# Altium PCB arduino_voltage_monitor_shield.PcbDoc
Units mm, origin at the board's own origin, x right, y up, seen from the top; angles counter-clockwise.
Board outline 50 x 53 mm, 2 copper layers (Top Layer, Bottom Layer); 58 components, 32 nets, 192 pads, 77 vias.
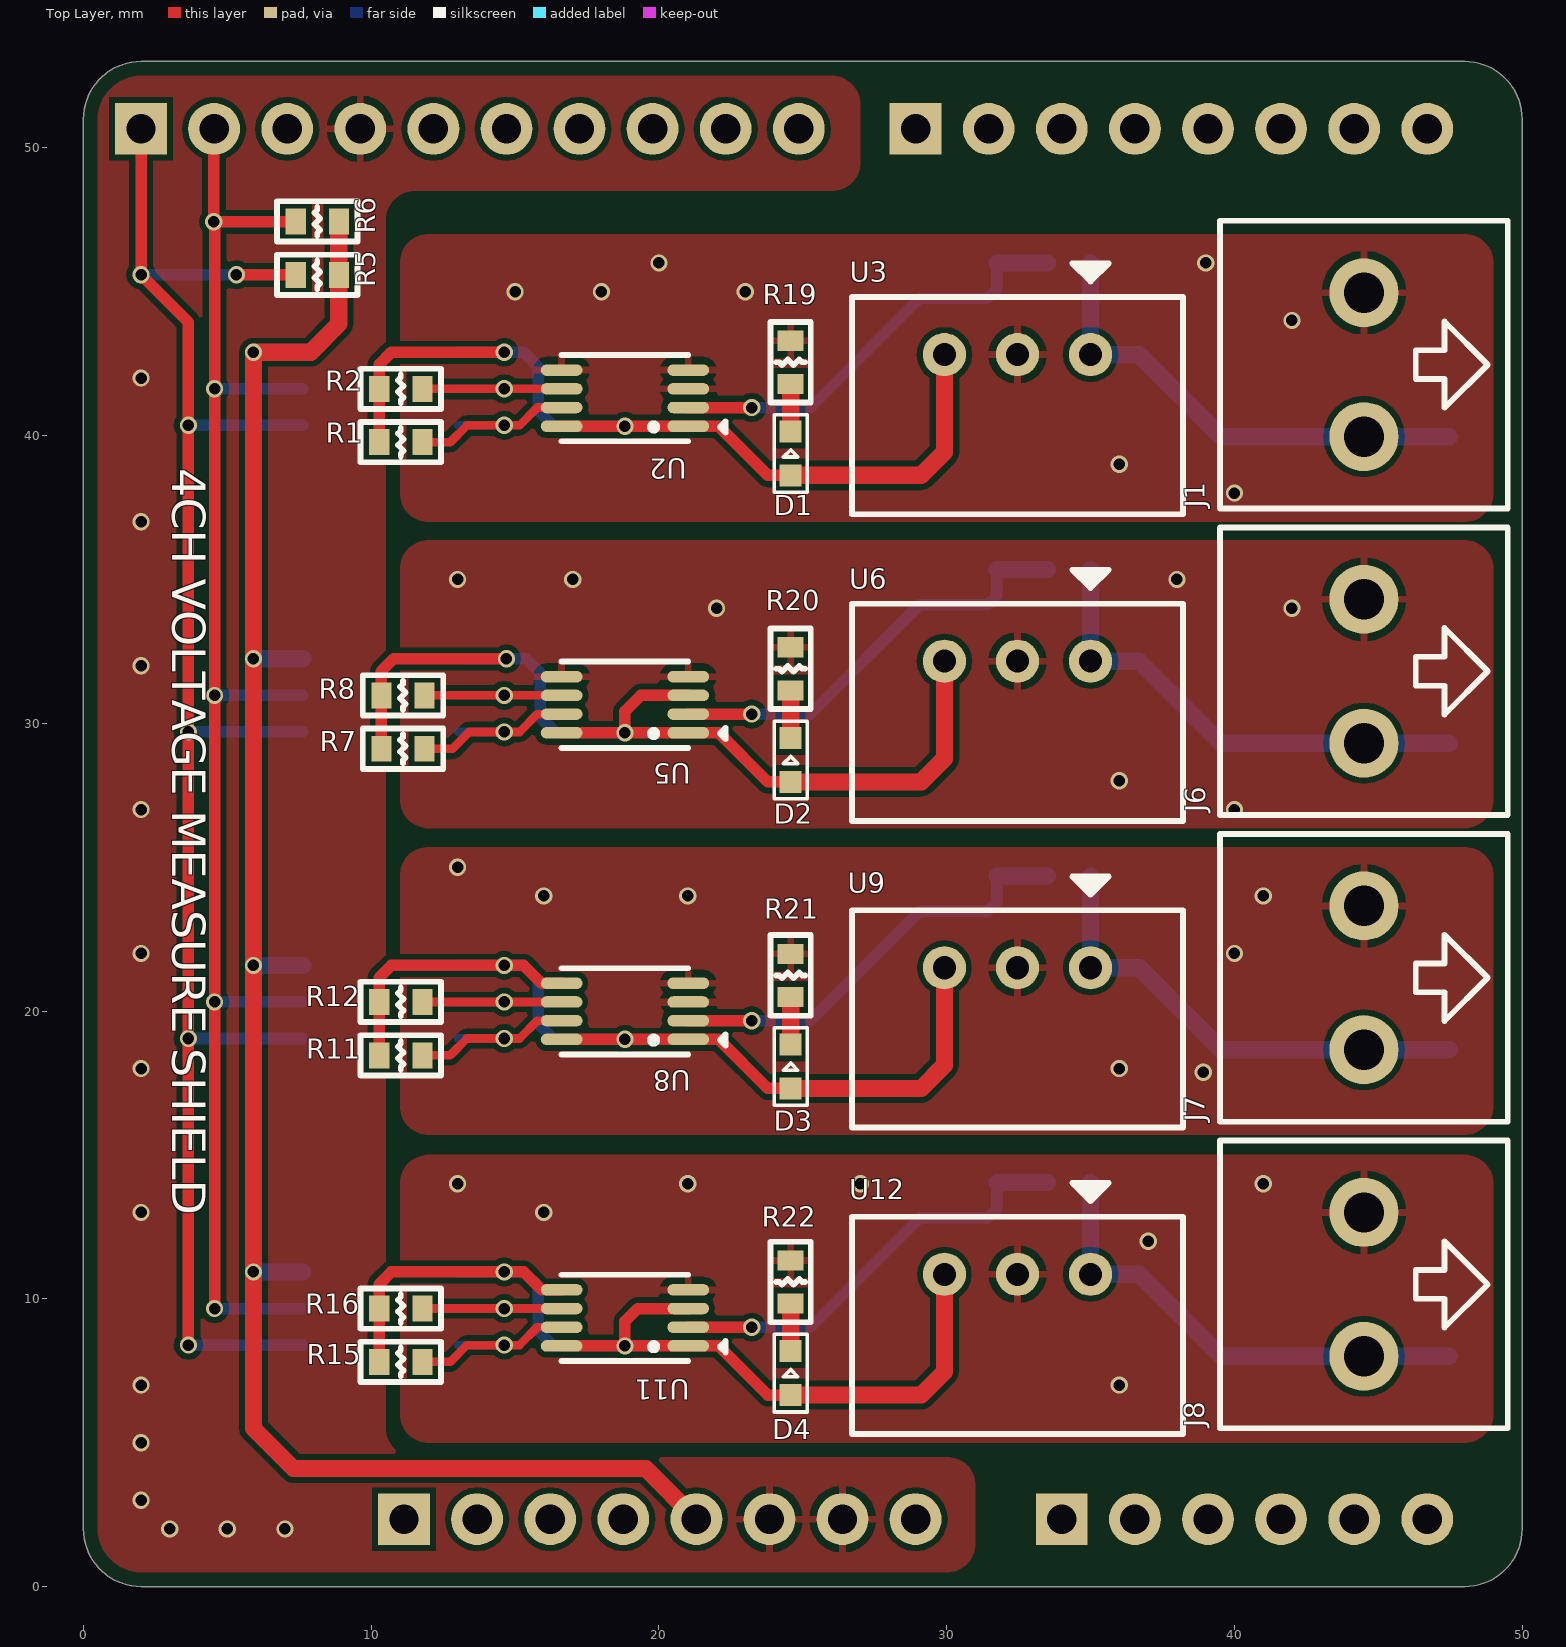
[diagram p0: Top Layer view]
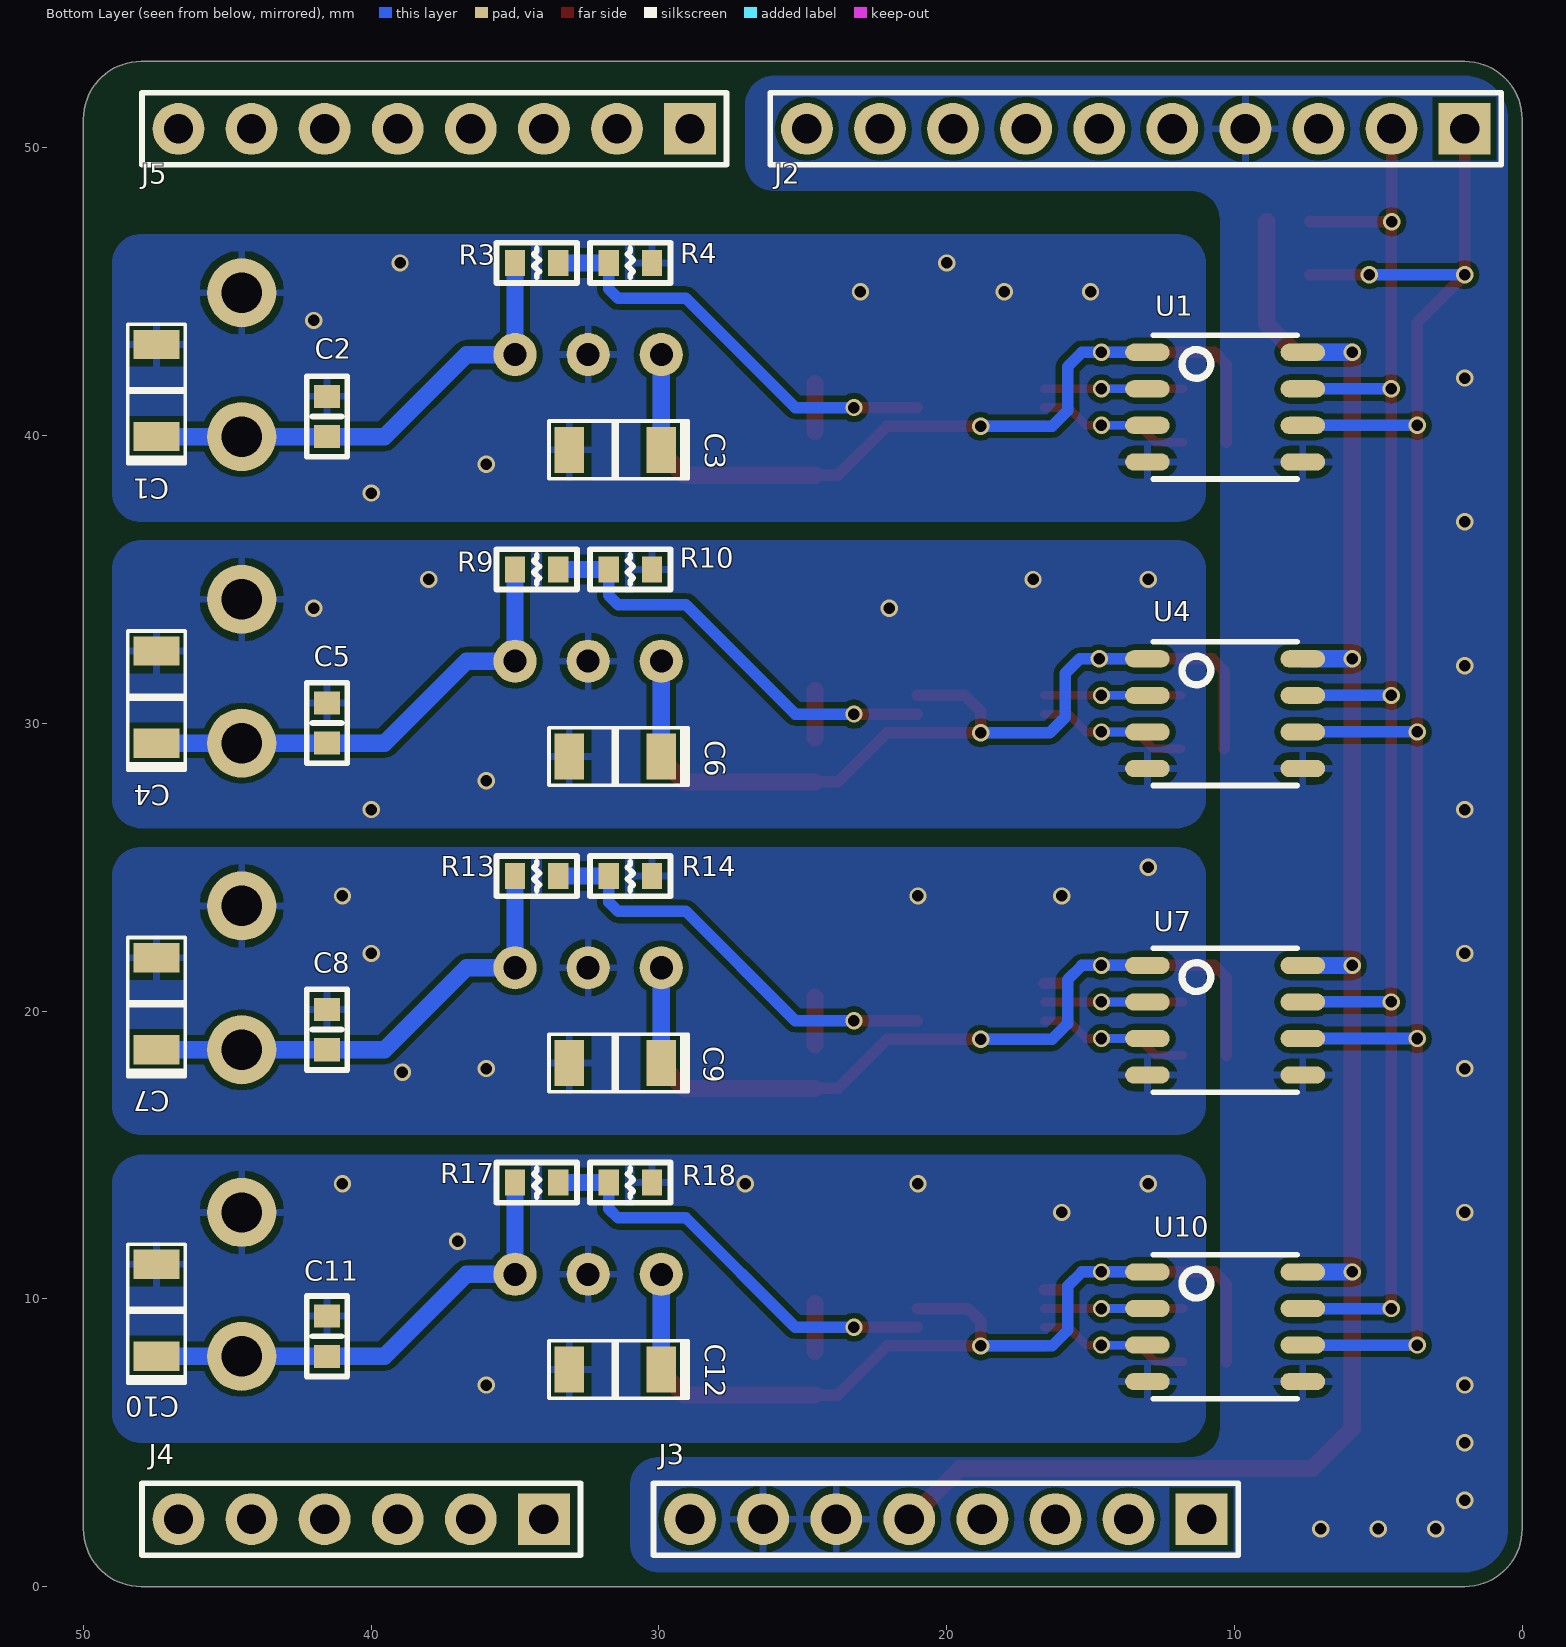
[diagram p1: Bottom Layer view, seen from below]
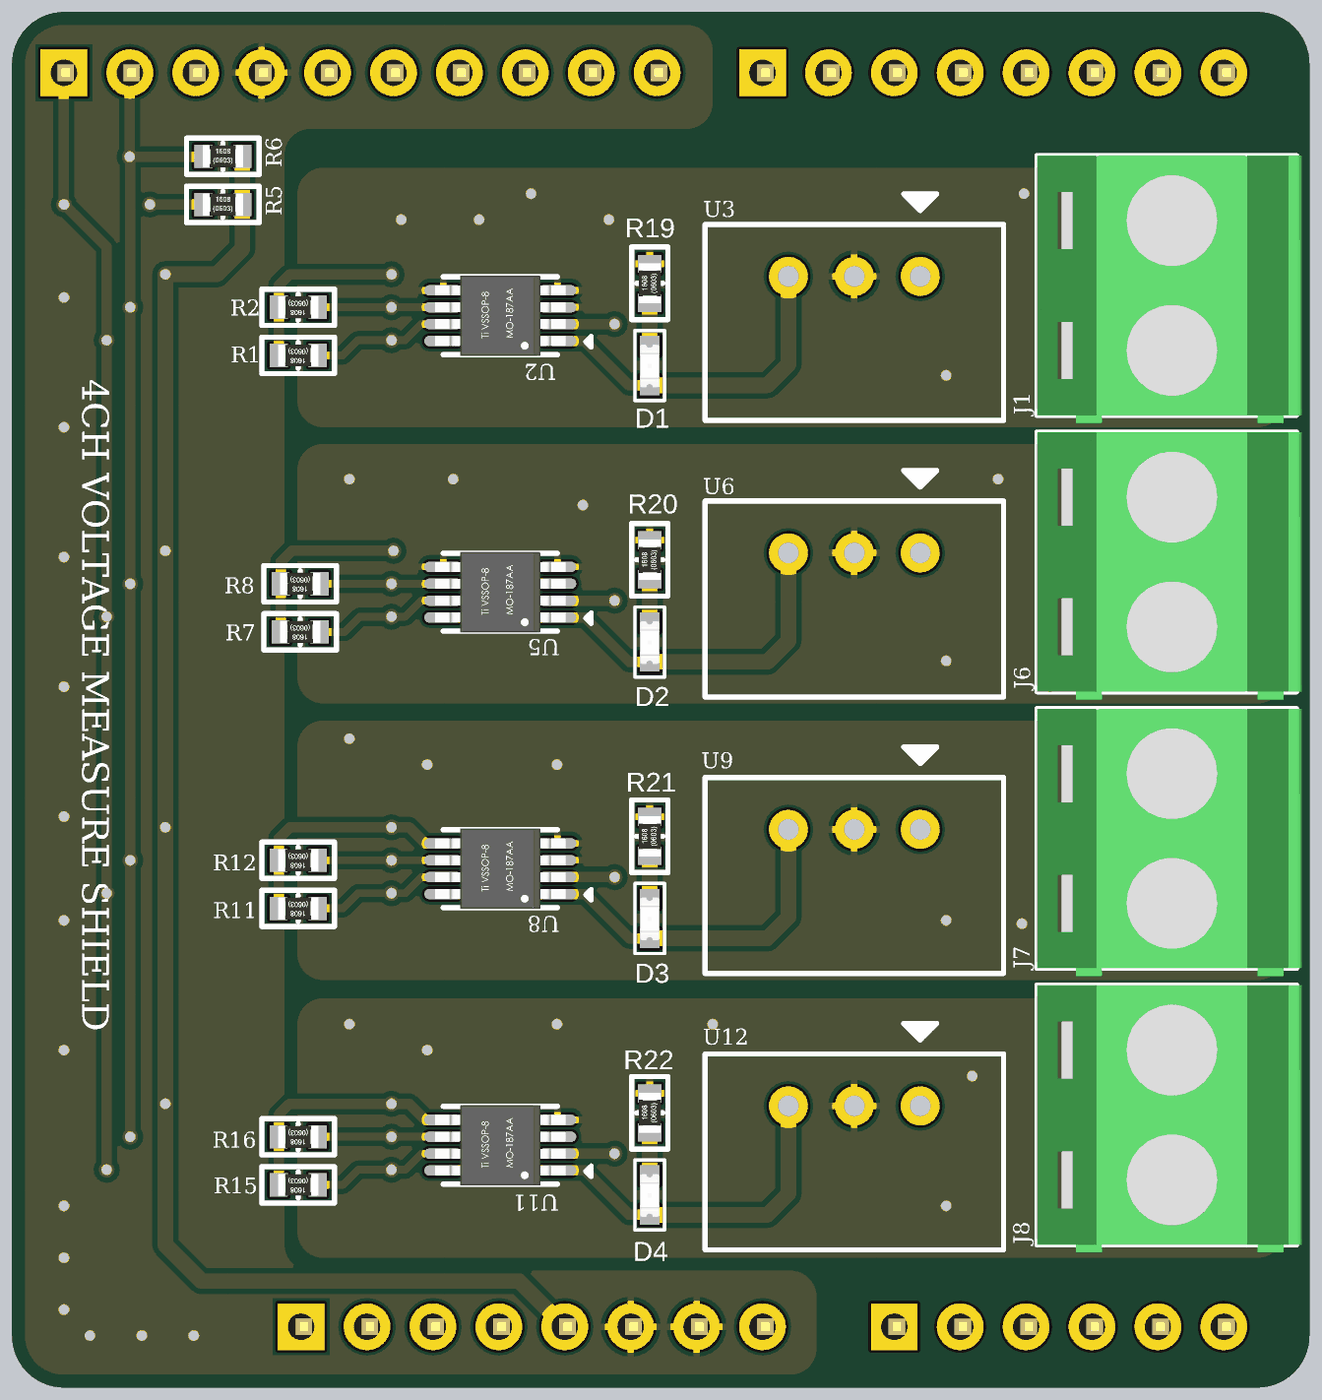
[diagram p2: 3D render of the assembled board from above, using the file's embedded part models]
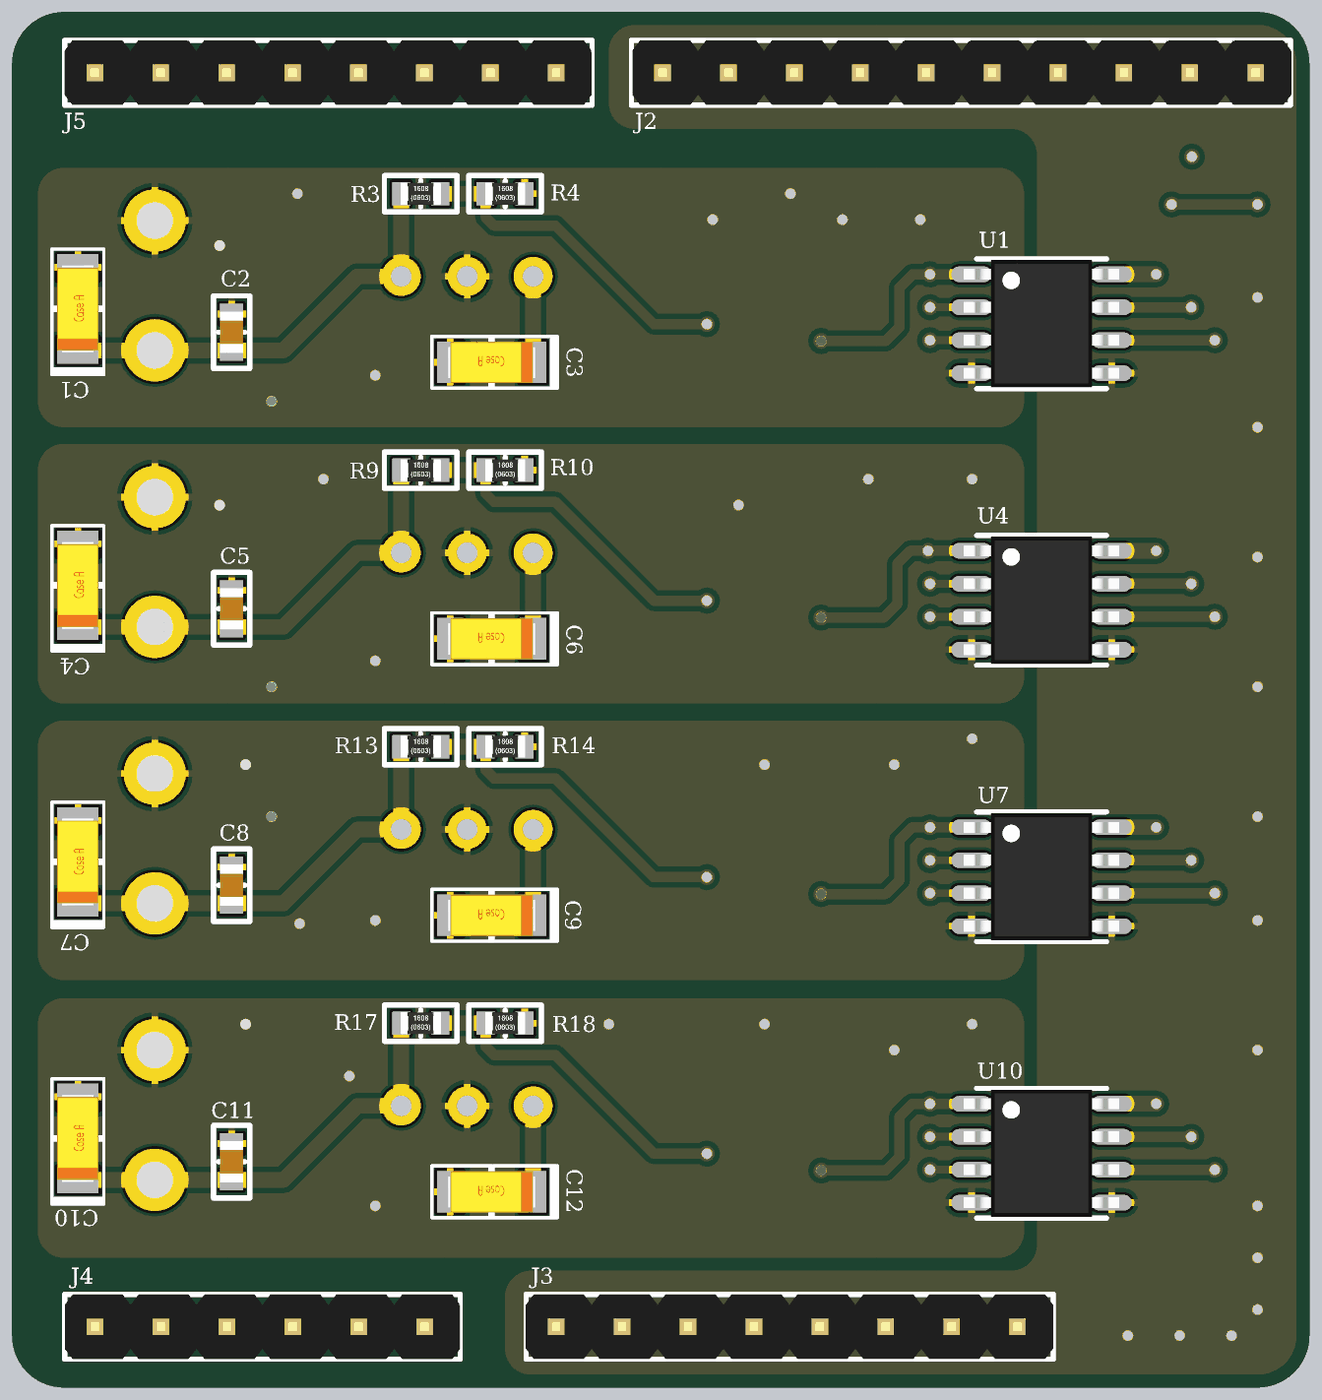
[diagram p3: 3D render of the assembled board from below, using the file's embedded part models]

## Layer stack, top to bottom
Top Solder: solder mask 0.0102, Solder Resist, Dk 3.5
Top Layer: signal copper 0.0356
Dielectric 1: dielectric 0.32, FR-4, Dk 4.8
Bottom Layer: signal copper 0.0356
Bottom Solder: solder mask 0.0102, Solder Resist, Dk 3.5

## Board outline
0,2 0,51 cw(c2,51) 2,53 48,53 cw(c48,51) 50,51 50,2 cw(c48,2) 48,0 2,0 cw(c2,2)

## Design rules (kind name [scope] priority, off if disabled: settings)
Clearance [All] p1: gap=0.2 ignorepadtopadclearanceinfootprint=FALSE
HoleSize [All] p1: absolutevalues=TRUE maxlimit=3.2 minlimit=0.025 maxpercent=80.000 minpercent=20.000
MinimumSolderMaskSliver [All] p1: minsoldermaskwidth=0.01
PolygonConnect PolygonConnect_1 [IsVia] p1: connectstyle=Direct reliefconductorwidth=0.254 reliefentries=4 polygonreliefangle="90 Angle" airgapwidth=0.254
PolygonConnect [All] p2: connectstyle=Relief reliefconductorwidth=0.254 reliefentries=4 polygonreliefangle="90 Angle" airgapwidth=0.254
RoutingVias [All] p1: holewidth=0.4 width=0.6 viastyle="Through Hole" minholewidth=0.4 minwidth=0.6 maxholewidth=0.4 maxwidth=0.6
SilkToSilkClearance [All] p1: silktosilkclearance=0.01
SilkToSolderMaskClearance [IsPad] p1: minsilkscreentomaskgap=0.1 clearancetoexposedcopper=TRUE
SolderMaskExpansion [All] p1: expansion=0.102
Width [All] p1: maxlimit=2 minlimit=0.2 preferedwidth=0.2
26 further rules are at their usual default settings.

## Components (designator, comment, footprint, x,y, rotation, side; value= is the part's Value field where it differs from the comment)
C1 "EC" ECAP-TANTAL-A 47.463,41.563 r90 bottom value=22uF/35V
C2 "C" CAP1608L 41.537,40.663 r270 bottom value=0.1uF
C3 "EC" ECAP-TANTAL-A 31.52,39.505 r0 bottom value=22uF/35V
C4 "EC" ECAP-TANTAL-A 47.463,30.908 r90 bottom value=22uF/35V
C5 "C" CAP1608L 41.537,30.008 r270 bottom value=0.1uF
C6 "EC" ECAP-TANTAL-A 31.52,28.85 r0 bottom value=22uF/35V
C7 "EC" ECAP-TANTAL-A 47.463,20.254 r90 bottom value=22uF/35V
C8 "C" CAP1608L 41.537,19.354 r270 bottom value=0.1uF
C9 "EC" ECAP-TANTAL-A 31.52,18.196 r0 bottom value=22uF/35V
C10 "EC" ECAP-TANTAL-A 47.463,9.6 r90 bottom value=22uF/35V
C11 "C" CAP1608L 41.537,8.7 r270 bottom value=0.1uF
C12 "EC" ECAP-TANTAL-A 31.52,7.542 r0 bottom value=22uF/35V
D1 "LED" LED1608L 24.577,39.379 r270 top value=GREEN
D2 "LED" LED1608L 24.577,28.725 r270 top value=GREEN
D3 "LED" LED1608L 24.577,18.07 r270 top value=GREEN
D4 "LED" LED1608L 24.577,7.416 r270 top value=GREEN
J1 "CON2" DG128-5.0-02P 44.5,42.463 r90 top
J2 "CON10" PIN-HEADER-2.54-10P 2,50.66 r180 bottom
J3 "CON8" PIN-HEADER-2.54-8P 11.14,2.34 r180 bottom
J4 "CON6" PIN-HEADER-2.54-6P 34,2.34 r180 bottom
J5 "CON8" PIN-HEADER-2.54-8P 28.92,50.66 r180 bottom
J6 "CON2" DG128-5.0-02P 44.5,31.808 r90 top
J7 "CON2" DG128-5.0-02P 44.5,21.154 r90 top
J8 "CON2" DG128-5.0-02P 44.5,10.5 r90 top
R1 "R" RES1608L 11.026,39.769 r180 top value=4.7K
R2 "R" RES1608L 11.026,41.624 r180 top value=4.7K
R3 "R" RES1608L 34.25,46 r180 bottom value=470K
R4 "R" RES1608L 30.996,46 r180 bottom value=110K
R5 "R" RES1608L 8.125,45.586 r0 top value=4.7K
R6 "R" RES1608L 8.125,47.44 r0 top value=4.7K
R7 "R" RES1608L 11.103,29.115 r180 top value=4.7K
R8 "R" RES1608L 11.103,30.969 r180 top value=4.7K
R9 "R" RES1608L 34.25,35.346 r180 bottom value=470K
R10 "R" RES1608L 30.996,35.346 r180 bottom value=110K
R11 "R" RES1608L 11.026,18.461 r180 top value=4.7K
R12 "R" RES1608L 11.026,20.315 r180 top value=4.7K
R13 "R" RES1608L 34.25,24.692 r180 bottom value=470K
R14 "R" RES1608L 30.996,24.692 r180 bottom value=110K
R15 "R" RES1608L 11.026,7.807 r180 top value=4.7K
R16 "R" RES1608L 11.026,9.661 r180 top value=4.7K
R17 "R" RES1608L 34.25,14.037 r180 bottom value=470K
R18 "R" RES1608L 30.996,14.037 r180 bottom value=110K
R19 "R" RES1608L 24.577,42.547 r90 top value=1K
R20 "R" RES1608L 24.577,31.892 r90 top value=1K
R21 "R" RES1608L 24.577,21.238 r90 top value=1K
R22 "R" RES1608L 24.577,10.584 r90 top value=1K
U1 "ISO1540" SOIC-8 10.324,40.989 r180 bottom
U2 "ADS7823" VSSOP-8_DGK 18.816,41.299 r180 top
U3 "R-785.0-0.5" R-785.0-0.5 32.46,42.813 r180 top
U4 "ISO1540" SOIC-8 10.324,30.334 r180 bottom
U5 "ADS7823" VSSOP-8_DGK 18.816,30.644 r180 top
U6 "R-785.0-0.5" R-785.0-0.5 32.46,32.158 r180 top
U7 "ISO1540" SOIC-8 10.324,19.68 r180 bottom
U8 "ADS7823" VSSOP-8_DGK 18.816,19.99 r180 top
U9 "R-785.0-0.5" R-785.0-0.5 32.46,21.504 r180 top
U10 "ISO1540" SOIC-8 10.324,9.026 r180 bottom
U11 "ADS7823" VSSOP-8_DGK 18.816,9.336 r180 top
U12 "R-785.0-0.5" R-785.0-0.5 32.46,10.85 r180 top

## Footprints (in the part's own frame and the unit in brackets; to place one, negate y for a bottom-side part, rotate by r counter-clockwise, add the part's x,y. Pads: shape width x height; smd on the part's side, far side on the other; paste and mask are expansions set on the pad)
CAP1608L [mm]
  rect 0.8x0.9 smd: 1(-0.7,0) 2(0.7,0)
  silkscreen extent -1.4,-0.7 1.4,0.7, body extent -0.8,-0.45 0.8,0.45, height 0.8
DG128-5.0-02P [mm]
  round 2.4 hole 1.4: 1(2.5,0) 2(-2.5,0)
  silkscreen extent -5,-5 5,5, body extent -5.3,-5.2 5,5, height 14.1
ECAP-TANTAL-A [mm]
  rect 1.016x1.6 smd: 1(-1.6,0) 2(1.6,0)
  silkscreen extent -2.53,-1 2.3,1, body extent -1.7,-0.79 1.69,0.81, height 1.65
LED1608L [mil]
  rect 30x30 smd: 1(-30,0) 2(30,0)
  silkscreen extent -53,-23 53,23, body extent -32,-14 33,14, height 27
PIN-HEADER-2.54-6P [mm]
  rect 1.8x1.8 hole 1.02: 1(0,0)
  round 1.8 hole 1.02: 2(-2.54,0) 3(-5.08,0) 4(-7.62,0) 5(-10.16,0) 6(-12.7,0)
  silkscreen extent -24.5,-1.25 1.27,1.5, body extent -13.97,-1.25 1.27,1.25, height 8.62
PIN-HEADER-2.54-8P [mm]
  rect 1.8x1.8 hole 1.02: 1(0,0)
  round 1.8 hole 1.02: 2(-2.54,0) 3(-5.08,0) 4(-7.62,0) 5(-10.16,0) 6(-12.7,0) 7(-15.24,0) 8(-17.78,0)
  silkscreen extent -24.5,-1.25 1.27,1.5, body extent -19.06,-1.25 1.26,1.25, height 8.62
PIN-HEADER-2.54-10P [mm]
  rect 1.8x1.8 hole 1.02: 1(0,0)
  round 1.8 hole 1.02: 2(-2.54,0) 3(-5.08,0) 4(-7.62,0) 5(-10.16,0) 6(-12.7,0) 7(-15.24,0) 8(-17.78,0) 9(-20.32,0) 10(-22.86,0)
  silkscreen extent -24.5,-1.25 1.27,1.5, body extent -24.1,-1.25 1.3,1.25, height 8.62
R-785.0-0.5 [mm]
  round 1.5 hole 0.8: 1(-2.54,0) 2(0,0) 3(2.54,0)
  silkscreen extent -5.75,-3.18 5.75,5.55, body extent -5.75,-2 5.75,5.55, height 10.2
RES1608L [mm]
  rect 0.7x0.9 smd: 1(-0.75,0) 2(0.75,0)
  silkscreen extent -1.4,-0.7 1.4,0.7, body extent -0.78,-0.43 0.78,0.43, height 0.45
SOIC-8 [mm]
  oval 1.55x0.6 smd: 1(-2.7,1.905) 2(-2.7,0.635) 3(-2.7,-0.635) 4(-2.7,-1.905) 5(2.7,-1.905) 6(2.7,-0.635) 7(2.7,0.635) 8(2.7,1.905)
  silkscreen extent -2.5,-2.5 2.5,2.5, body extent -3,-2.45 3,2.45, height 1.75
VSSOP-8_DGK [mm]
  oval 1.45x0.4 smd: 1(-2.2,0.975) 2(-2.2,0.325) 3(-2.2,-0.325) 4(-2.2,-0.975) 5(2.2,-0.975) 6(2.2,-0.325) 7(2.2,0.325) 8(2.2,0.975)
  silkscreen extent -3.5,-1.5 2.2,1.5, body extent -2.52,-1.55 2.52,1.55, height 1.15

## Part data
C1 C3 C4 C6 C7 C9 C10 C12: "Polarized Capacitor"
C2 C5 C8 C11: "Non-polarized Capacitor"
D1 D2 D3 D4: "Typical LED"
J1 J6 J7 J8: "Generic Connector 2 Pin"
J2: "Generic Connector 10 Pin"
J3 J5: "Generic Connector 8 Pin"
J4: "Generic Connector 6 Pin"
R1 R2 R3 R4 R5 R6 R7 R8 R9 R10 R11 R12 R13 R14 R15 R16 R17 R18 R19 R20 R21 R22: "Resistor"
U1 U4 U7 U10: "ISO154x Low-Power Bidirectional I2C Isolators"
U2 U5 U8 U11: "12-Bit, Sampling A/D Converter with I2C⑩ INTERFACE"
U3 U6 U9 U12: "R-78xx-Series high efficiency switching regulators"

## Via types
v1: diameter 0.6, hole 0.4, Top Layer to Bottom Layer, tented both sides, 77 vias

## Nets (pads, with @x,y where several pads share a name; then routed paths per layer and width w, separated by ;. In a path a pad name is that pad's centre, name@x,y a point inside that pad or via, vN(x,y) a via of type N, cw(c..) or ccw(c..) an arc to the next point about the centre after c; other vN are vias at no path point)
+5V: J3.5 R5.2 R6.2 U1.8 U4.8 U7.8 U10.8 | length 67.9
  Top Layer w0.6: R6.2 R5.2 8.875,43.875 7.894,42.894 v1(5.906,42.894) v1(5.906,32.239) v1(5.906,21.585) v1(5.906,10.931) 5.906,5.494 7.3,4.1 19.54,4.1 J3.5
  Bottom Layer w0.6: v1(5.906,10.931) U10.8 ; v1(5.906,21.585) U7.8 ; v1(5.906,32.239) U4.8 ; v1(5.906,42.894) U1.8
+5V1: C3.1 D1.2 R1.2 R2.2 U1.1 U2.1 U2.8 U3.3 | length 36
  Top Layer w0.4: R1.2 R2.2 10.276,42.47 10.7,42.894 v1(14.624,42.894) ; U2.8 U2.1 22.076,40.324 23.783,38.617 D1.2
  Top Layer w0.6: D1.2 29.117,38.617 29.92,39.42 U3.3
  Bottom Layer w0.4: U1.1 v1(14.624,42.894) 15.3,42.894 15.8,42.394 15.8,40.863 16.339,40.324 v1(18.816,40.324)
  Bottom Layer w0.6: C3.1 U3.3
+5V2: C6.1 D2.2 R7.2 R8.2 U4.1 U5.1 U5.3 U5.8 U6.3 | length 39.2
  Top Layer w0.4: R7.2 R8.2 10.353,31.816 10.776,32.239 v1(14.7,32.239) ; U5.8 v1(18.816,29.669) ; U5.3 19.369,30.969 18.816,30.416 v1(18.816,29.669) ; D2.2 23.783,27.963 22.076,29.669 U5.1 v1(18.816,29.669)
  Top Layer w0.6: D2.2 29.117,27.963 29.92,28.766 U6.3
  Bottom Layer w0.4: U4.1@13.1,32.239 v1(14.7,32.239) 15.376,32.239 15.876,31.739 15.876,30.208 16.415,29.669 v1(18.816,29.669) v1@18.892,29.669
  Bottom Layer w0.6: C6.1 U6.3
+5V3: C9.1 D3.2 R11.2 R12.2 U7.1 U8.1 U8.5 U8.8 U9.3 | length 38.3
  Top Layer w0.4: R11.2 R12.2 10.276,21.162 10.7,21.585 v1(14.624,21.585) 15.3,21.585 15.92,20.965 U8.5 ; U8.8 U8.1 22.076,19.015 23.783,17.308 D3.2
  Top Layer w0.6: D3.2 29.117,17.308 29.92,18.112 U9.3
  Bottom Layer w0.4: U7.1 v1(14.624,21.585) 15.3,21.585 15.8,21.085 15.8,19.554 16.339,19.015 v1(18.816,19.015)
  Bottom Layer w0.6: C9.1 U9.3
+5V4: C12.1 D4.2 R15.2 R16.2 U10.1 U11.1 U11.3 U11.5 U11.8 U12.3 | length 41.5
  Top Layer w0.4: R15.2 R16.2 10.276,10.507 10.7,10.931 v1(14.624,10.931) 15.3,10.931 15.92,10.311 U11.5 ; U11.8 v1(18.816,8.361) ; U11.3 19.261,9.661 18.816,9.216 v1(18.816,8.361) ; D4.2 23.783,6.654 22.076,8.361 U11.1 v1(18.816,8.361)
  Top Layer w0.6: D4.2 29.117,6.654 29.92,7.457 U12.3
  Bottom Layer w0.4: U10.1 v1(14.624,10.931) 15.3,10.931 15.8,10.431 15.8,8.9 16.339,8.361 v1(18.816,8.361)
  Bottom Layer w0.6: C12.1 U12.3
GND: J2.4 J3.6 J3.7 U1.5 U4.5 U7.5 U10.5
  other v1: 3,2 5,2 7,2 2,3 2,5 2,7 2,13 2,18 2,22 2,27 2,32 2,37 2,42
GND1: C1.2 C2.1 C3.2 J1.1 R4.2 R19.2 U1.4 U2.3 U2.4 U2.5 U3.2
  other v1: 40,38 36,39 42,44 15,45 18,45 23,45 20,46 39,46
GND2: C4.2 C5.1 C6.2 J6.1 R10.2 R20.2 U4.4 U5.4 U5.5 U6.2
  other v1: 40,27 36,28 22,34 42,34 13,35 17,35 38,35
GND3: C7.2 C8.1 C9.2 J7.1 R14.2 R21.2 U7.4 U8.3 U8.4 U9.2
  other v1: 38.917,17.871 36,18 40,22 16,24 21,24 41,24 13,25
GND4: C10.2 C11.1 C12.2 J8.1 R18.2 R22.2 U10.4 U11.4 U12.2
  other v1: 36,7 37,12 16,13 13,14 21,14 27,14 41,14
NetC1_1: C1.1 C2.2 J1.2 R3.1 U3.1 | length 16.8
  Bottom Layer w0.6: R3.1 U3.1 36.687,42.813 39.537,39.963 C2.2 J1.2 C1.1
NetC4_1: C4.1 C5.2 J6.2 R9.1 U6.1 | length 16.8
  Bottom Layer w0.6: R9.1 U6.1 36.687,32.158 39.537,29.308 C5.2 J6.2 C4.1
NetC7_1: C7.1 C8.2 J7.2 R13.1 U9.1 | length 16.8
  Bottom Layer w0.6: R13.1 U9.1 36.687,21.504 39.537,18.654 C8.2 J7.2 C7.1
NetC10_1: C10.1 C11.2 J8.2 R17.1 U12.1 | length 16.8
  Bottom Layer w0.6: R17.1 U12.1 36.687,10.85 39.537,8 C11.2 J8.2 C10.1
NetD1_1: D1.1 R19.1 | length 1.7
  Top Layer w0.6: D1.1 R19.1
NetD2_1: D2.1 R20.1 | length 1.7
  Top Layer w0.6: D2.1 R20.1
NetD3_1: D3.1 R21.1 | length 1.7
  Top Layer w0.6: D3.1 R21.1
NetD4_1: D4.1 R22.1 | length 1.7
  Top Layer w0.6: D4.1 R22.1
NetJ2_1: J2.1 R5.1 U1.6 U4.6 U7.6 U10.6 | length 64.2
  Top Layer w0.4: J2.1 v1(2,45.586) 3.646,43.94 v1(3.646,40.354) v1(3.646,29.699) v1(3.646,19.045) v1(3.646,8.391) ; v1(5.314,45.586) R5.1
  Bottom Layer w0.4: v1(2,45.586) v1(5.314,45.586) ; v1(3.646,8.391) U10.6 ; v1(3.646,19.045) U7.6 ; v1(3.646,29.699) U4.6 ; v1(3.646,40.354) U1.6
NetJ2_2: J2.2 R6.1 U1.7 U4.7 U7.7 U10.7 | length 56.1
  Top Layer w0.4: J2.2 4.531,50.651 v1(4.531,47.426) ; v1(4.555,9.661) v1(4.555,20.315) v1(4.555,30.969) v1(4.555,41.624) 4.555,47.402 v1(4.531,47.426) ; R6.1 7.361,47.426 v1(4.531,47.426)
  Bottom Layer w0.4: v1(4.555,9.661) U10.7 ; v1(4.555,20.315) U7.7 ; v1(4.555,30.969) U4.7 ; v1(4.555,41.624) U1.7
NetR1_1: R1.1 U1.3 U2.7 | length 6.9
  Top Layer w0.3: R1.1 12.746,39.769 13.33,40.354 v1(14.624,40.354) 15.154,40.354 15.774,40.974 U2.7
  Bottom Layer w0.3: U1.3 v1(14.624,40.354)
NetR2_1: R2.1 U1.2 U2.6 | length 6.4
  Top Layer w0.3: R2.1 v1(14.624,41.624) U2.6
  Bottom Layer w0.3: U1.2 v1(14.624,41.624)
NetR3_2: R3.2 R4.1 U2.2 | length 15.1
  Top Layer w0.4: U2.2 v1(23.223,40.974)
  Bottom Layer w0.4: v1(23.223,40.974) 25.265,40.974 29.064,44.773 31.423,44.773 31.746,45.096 R4.1
  Bottom Layer w0.6: R4.1 R3.2
NetR7_1: R7.1 U4.3 U5.7 | length 6.9
  Top Layer w0.3: R7.1 12.822,29.115 13.406,29.699 v1@14.7,29.699 ; v1(14.624,29.699) 15.154,29.699 15.774,30.319 U5.7
  Bottom Layer w0.3: U4.3 v1(14.624,29.699)
NetR8_1: R8.1 U4.2 U5.6 | length 6.4
  Top Layer w0.3: R8.1 v1@14.7,30.969 ; v1(14.624,30.969) U5.6
  Bottom Layer w0.3: U4.2 v1(14.624,30.969)
NetR9_2: R9.2 R10.1 U5.2 | length 15.1
  Top Layer w0.4: U5.2 v1(23.223,30.319)
  Bottom Layer w0.4: v1(23.223,30.319) 25.265,30.319 29.064,34.119 31.423,34.119 31.746,34.442 R10.1
  Bottom Layer w0.6: R10.1 R9.2
NetR11_1: R11.1 U7.3 U8.7 | length 6.9
  Top Layer w0.3: R11.1 12.746,18.461 13.33,19.045 v1(14.624,19.045) 15.154,19.045 15.774,19.665 U8.7
  Bottom Layer w0.3: U7.3 v1(14.624,19.045)
NetR12_1: R12.1 U7.2 U8.6 | length 6.4
  Top Layer w0.3: R12.1 v1(14.624,20.315) U8.6
  Bottom Layer w0.3: U7.2 v1(14.624,20.315)
NetR13_2: R13.2 R14.1 U8.2 | length 15.1
  Top Layer w0.4: U8.2 v1(23.223,19.665)
  Bottom Layer w0.4: v1(23.223,19.665) 25.265,19.665 29.064,23.465 31.423,23.465 31.746,23.788 R14.1
  Bottom Layer w0.6: R14.1 R13.2
NetR15_1: R15.1 U10.3 U11.7 | length 6.9
  Top Layer w0.3: R15.1 12.746,7.807 13.33,8.391 v1(14.624,8.391) 15.154,8.391 15.774,9.011 U11.7
  Bottom Layer w0.3: U10.3 v1(14.624,8.391)
NetR16_1: R16.1 U10.2 U11.6 | length 6.4
  Top Layer w0.3: R16.1 v1(14.624,9.661) U11.6
  Bottom Layer w0.3: U10.2 v1(14.624,9.661)
NetR17_2: R17.2 R18.1 U11.2 | length 15.1
  Top Layer w0.4: U11.2 v1(23.223,9.011)
  Bottom Layer w0.4: v1(23.223,9.011) 25.265,9.011 29.064,12.81 31.423,12.81 31.746,13.133 R18.1
  Bottom Layer w0.6: R18.1 R17.2
pads on no net: J2.3 J2.5 J2.6 J2.7 J2.8 J2.9 J2.10 J3.1 J3.2 J3.3 J3.4 J3.8 J4.1 J4.2 J4.3 J4.4 J4.5 J4.6 J5.1 J5.2 J5.3 J5.4 J5.5 J5.6 J5.7 J5.8

## Polygon pours and split planes (outlines as drawn)
GND on Top Layer "GND_L01_P036" (solid, remove dead copper, pour order 36): 30,4.5 cw(c30,3.5) 31,3.5 31,1.5 cw(c30,1.5) 30,0.5 2,0.5 cw(c2,2) 0.5,2 0.5,51 cw(c2,51) 2,52.5 26,52.5 cw(c26,51.5) 27,51.5 27,49.5 cw(c26,49.5) 26,48.5 11.5,48.5 ccw(c11.5,47.5) 10.5,47.5 10.5,5.5 ccw(c11.5,5.5) 11.5,4.5
GND4 on Top Layer "GND4_L01_P010" (solid, remove dead copper, pour order 10): 48,5 ccw(c48,6) 49,6 49,14 ccw(c48,14) 48,15 12,15 ccw(c12,14) 11,14 11,6 ccw(c12,6) 12,5
GND3 on Top Layer "GND3_L01_P008" (solid, remove dead copper, pour order 8): 48,15.7 ccw(c48,16.7) 49,16.7 49,24.7 ccw(c48,24.7) 48,25.7 12,25.7 ccw(c12,24.7) 11,24.7 11,16.7 ccw(c12,16.7) 12,15.7
GND2 on Top Layer "GND2_L01_P006" (solid, remove dead copper, pour order 6): 48,26.36 ccw(c48,27.36) 49,27.36 49,35.36 ccw(c48,35.36) 48,36.36 12,36.36 ccw(c12,35.36) 11,35.36 11,27.36 ccw(c12,27.36) 12,26.36
GND1 on Top Layer "GND1_L01_P002" (solid, remove dead copper, pour order 2): 48,37 ccw(c48,38) 49,38 49,46 ccw(c48,46) 48,47 12,47 ccw(c12,46) 11,46 11,38 ccw(c12,38) 12,37
GND on Bottom Layer "GND_L02_P034" (solid, remove dead copper, pour order 34): 30,4.5 cw(c30,3.5) 31,3.5 31,1.5 cw(c30,1.5) 30,0.5 2,0.5 cw(c2,2) 0.5,2 0.5,51 cw(c2,51) 2,52.5 26,52.5 cw(c26,51.5) 27,51.5 27,49.5 cw(c26,49.5) 26,48.5 11.5,48.5 ccw(c11.5,47.5) 10.5,47.5 10.5,5.5 ccw(c11.5,5.5) 11.5,4.5
GND4 on Bottom Layer "GND4_L02_P030" (solid, remove dead copper, pour order 30): 48,5 ccw(c48,6) 49,6 49,14 ccw(c48,14) 48,15 12,15 ccw(c12,14) 11,14 11,6 ccw(c12,6) 12,5
GND3 on Bottom Layer "GND3_L02_P028" (solid, remove dead copper, pour order 28): 48,15.7 ccw(c48,16.7) 49,16.7 49,24.7 ccw(c48,24.7) 48,25.7 12,25.7 ccw(c12,24.7) 11,24.7 11,16.7 ccw(c12,16.7) 12,15.7
GND2 on Bottom Layer "GND2_L02_P020" (solid, remove dead copper, pour order 20): 48,26.36 ccw(c48,27.36) 49,27.36 49,35.36 ccw(c48,35.36) 48,36.36 12,36.36 ccw(c12,35.36) 11,35.36 11,27.36 ccw(c12,27.36) 12,26.36
GND1 on Bottom Layer "GND1_L02_P014" (solid, remove dead copper, pour order 14): 48,37 ccw(c48,38) 49,38 49,46 ccw(c48,46) 48,47 12,47 ccw(c12,46) 11,46 11,38 ccw(c12,38) 12,37

## Silkscreen, mask and mechanical layers (free items; w line width, h text height)
Top Overlay:
  text "4CH VOLTAGE MEASURE SHIELD" at 2.708,38.87 h2 r270
Mechanical 1:
  the board outline again, w0.2